# Altium PCB PCB.PcbDoc (part 2 of 2)
Units mm, origin at the board's own origin, x right, y up, seen from the top; angles counter-clockwise.
Board outline 109.77 x 110 mm, 2 copper layers (Top Layer, Bottom Layer); 52 components, 34 nets, 218 pads, 26 vias.
Unrouted connection lines stored in the file: 55.
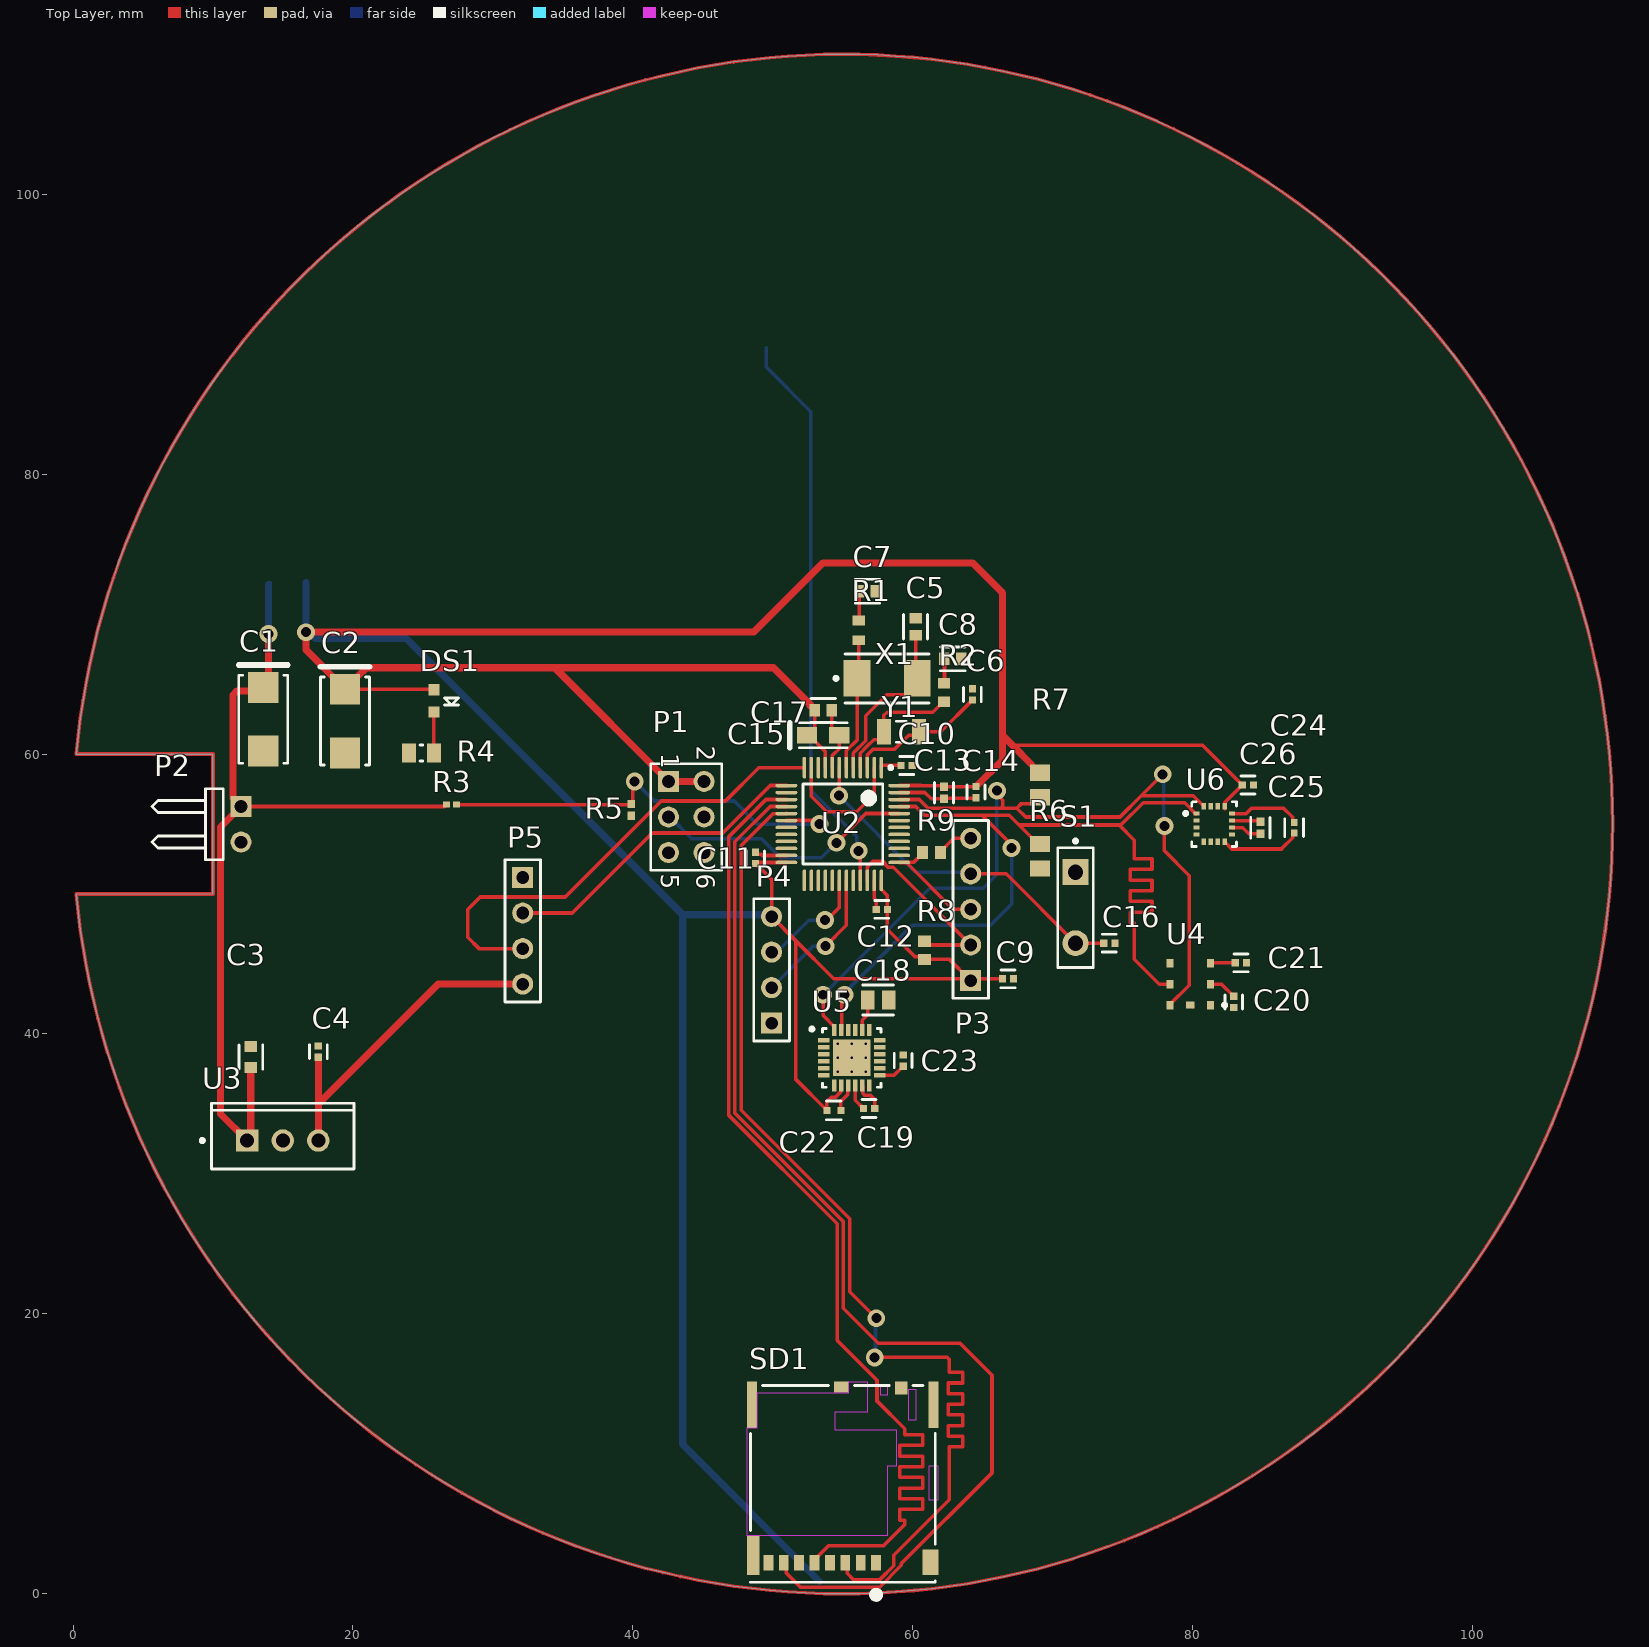
[diagram p0: Top Layer view]

## Via types
v1: diameter 1.27, hole 0.711, Top Layer to Bottom Layer, 17 vias
v2: diameter 0.5, hole 0.2, Top Layer to Bottom Layer, 9 vias

## Nets (pads, with @x,y where several pads share a name; then routed paths per layer and width w, separated by ;. In a path a pad name is that pad's centre, name@x,y a point inside that pad or via, vN(x,y) a via of type N, cw(c..) or ccw(c..) an arc to the next point about the centre after c; other vN are vias at no path point) (continued)
SWCLK: (continued)
  Top Layer w0.254: R9.2 60.687,52.884 60.055,52.252 59.027,52.252 U2.37 59.671,52.25 59.673,52.248 59.673,52.121 62.899,48.895 P3.3
SWDIO: P3.2 R8.1 U2.34 | length 14.4
  Top Layer w0.254: U2.34 56.75,51.924 57.15,52.324 57.874,52.324 58.023,52.175 58.023,52.104 58.229,51.898 58.592,51.898 P3.2 61.102,46.355 R8.1
pads on no net: SD1.1 SD1.8 SD1.9 SD1.10 U2.10 U2.14 U2.19 U2.21 U2.22 U2.25 U2.26 U2.27 U2.28 U2.29 U2.32 U2.39 U2.40 U2.41 U2.42 U2.43 U4.1 U4.4 U5.2 U5.3 U5.4 U5.5 U5.7 U5.12 U5.14 U5.15 U5.16 U5.17 U5.19 U5.21 U5.22 U5.25 U6.3 U6.5 U6.6 U6.7 U6.14 U6.15
copper on no net: | length 365.1
  Top Layer w0.254: 0.228,50 10,50 10,60 0.228,60 cw(c55,55) 0.229,49.987
  other v2: 54.638,37.297 55.638,37.297 56.638,37.297 54.638,38.297 55.638,38.297 56.638,38.297 54.638,39.297 55.638,39.297 56.638,39.297

## Text inside footprints (layer, text, board x,y; h text height)
P1: Top Overlay "1" at 42.037,60.071 h1.27 r270; Top Overlay "2" at 44.577,60.579 h1.27 r270; Top Overlay "5" at 42.037,51.435 h1.27 r270; Top Overlay "6" at 44.577,51.435 h1.27 r270